# Altium PCB gecko3.PcbDoc (part 8 of 8)
Units mm, origin at the board's own origin, x right, y up, seen from the top; angles counter-clockwise.
Board outline 85.5 x 54.02 mm, 10 copper layers (Top Layer, MidLayer1, 1.2 & 2.5V Plane, GND Plane1, DDR layer 1, 3.3V Plane, DDR layer 2, GND Plane2, MidLayer2, Bottom Layer), stack 1.39 mm thick; 295 components, 567 nets, 2310 pads, 1568 vias.
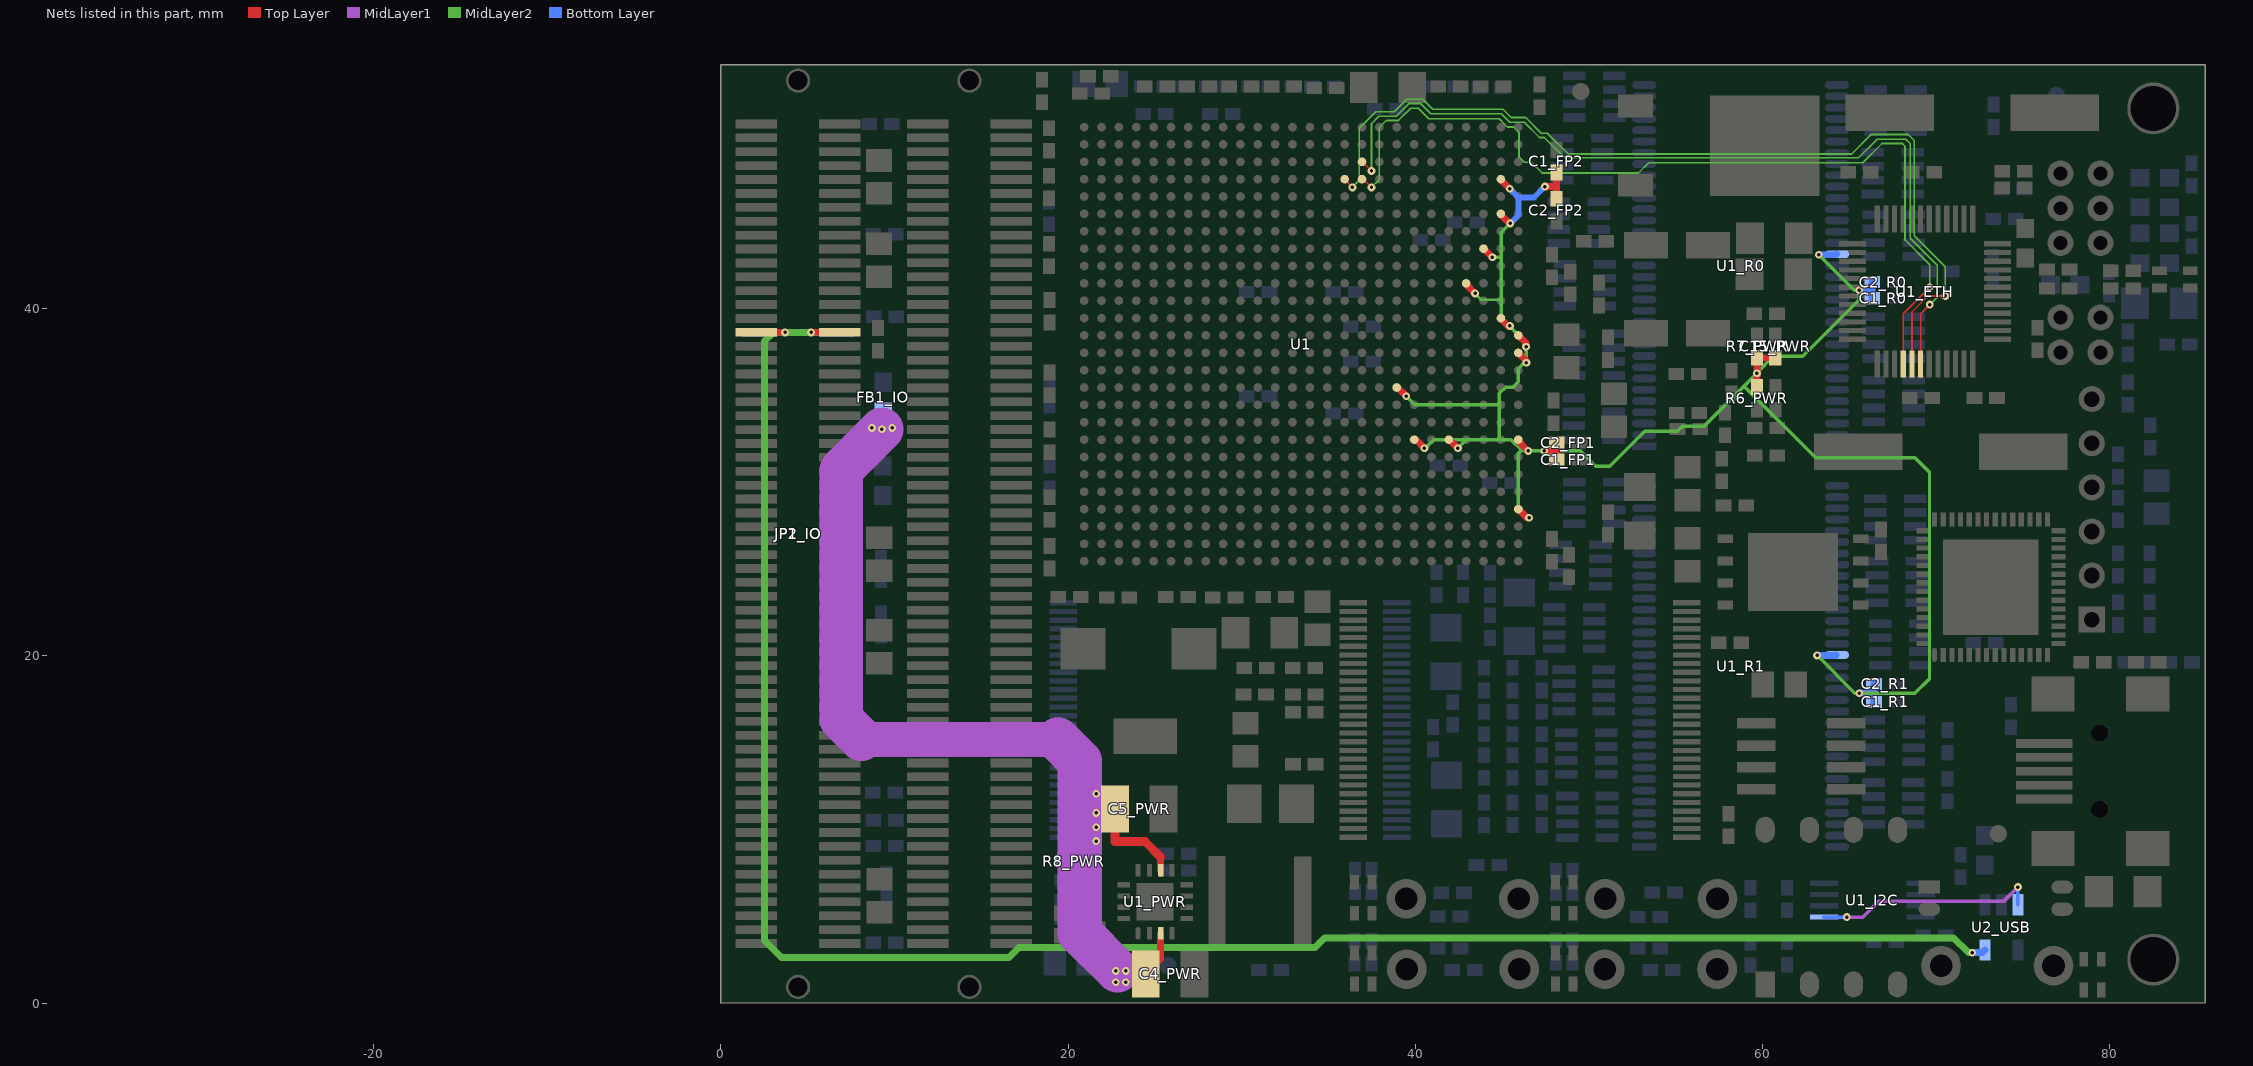
[diagram p16: the nets of this part, all layers, seen from the top]

## Via types
v1: diameter 0.45, hole 0.2, Top Layer to Bottom Layer, tented both sides, 1470 vias
v2: diameter 0.45, hole 0.2, Top Layer to Bottom Layer, tented bottom, 62 vias
v3: diameter 0.35, hole 0.15, Top Layer to MidLayer1, tented both sides, 26 vias
v4: diameter 0.45, hole 0.2, MidLayer2 to Bottom Layer, tented both sides, 10 vias

## Nets (pads, with @x,y where several pads share a name; then routed paths per layer and width w, separated by ;. In a path a pad name is that pad's centre, name@x,y a point inside that pad or via, vN(x,y) a via of type N, cw(c..) or ccw(c..) an arc to the next point about the centre after c; other vN are vias at no path point) (continued)
TXD_1: U1.AC10 U1_ETH.4 | length 52
  Top Layer w0.1: U1.AC10@36.927,47.449 37.001,47.449 v1(37.475,46.975) ; U1_ETH.4@68.1,36.8 68.1,39.7 v1(69.625,41.225)
  MidLayer2 w0.1: v1(37.475,46.975) 37.925,47.425 37.925,50.425 38.325,50.825 39.025,50.825 39.725,51.525 40.175,51.525 40.773,50.927 44.823,50.927 45.137,50.612 45.3,50.45 45.65,50.45 45.975,50.125 45.975,48.725 46.275,48.425 46.675,48.425 47.3,47.8 52.85,47.8 53.45,48.4 65.775,48.4 66.875,49.5 68.05,49.5 68.2,49.35 68.2,43.95 69.625,42.525 v1(69.625,41.225)
TXD_2: U1.AC11 U1_ETH.5 | length 53.8
  Top Layer w0.1: U1.AC11@35.927,47.449 35.927,47.423 v1(36.375,46.975) ; U1_ETH.5@68.6,36.8 68.6,39.8 69.525,40.725 v1(70.525,40.725)
  MidLayer2 w0.1: v1(36.375,46.975) 36.775,47.375 36.775,50.375 37.725,51.325 38.775,51.325 39.5,52.05 40.425,52.05 41,51.475 45.05,51.475 45.525,51 46.35,51 47.25,50.1 47.6,50.1 48.8,48.9 65.125,48.9 66.25,50.025 68.375,50.025 68.725,49.675 68.725,44.2 70.525,42.4 v1(70.525,40.725)
TXD_3: U1.AD10 U1_ETH.6 | length 50.5
  Top Layer w0.1: U1.AD10@36.976,48.424 v1(37.475,47.925) ; U1_ETH.6@69.1,36.8 69.1,39.7 v1(69.625,40.225)
  MidLayer2 w0.1: v1(37.475,47.925) 37.475,50.65 37.9,51.075 38.9,51.075 39.625,51.8 40.305,51.8 40.892,51.213 44.942,51.213 45.34,50.815 45.43,50.725 46.275,50.725 47.15,49.85 47.425,49.85 48.6,48.675 65.525,48.675 66.6,49.75 68.25,49.75 68.5,49.5 68.5,44.05 70.05,42.5 70.05,40.65 v1(69.625,40.225)
UBATT: C4_PWR.2 C5_PWR.2 FB1_IO.1 R8_PWR.1 U1_PWR.3 U1_PWR.10 | length 56.2
  Top Layer w0.4: C4_PWR.2@24.475,1.675 25.331,2.531 U1_PWR.3@25.331,4.019 ; U1_PWR.10@25.331,7.659 25.331,8.394
  Top Layer w0.5: C5_PWR.2@22.7,11.175 22.7,9.3 24.425,9.3 25.331,8.394
  MidLayer1 w2: 8.097,15.178 19.425,15.178
  MidLayer1 w2.5: 8.097,15.178 6.925,16.35 6.925,30.7 v1(9.275,33.05)
  MidLayer1 w2.54: 19.425,15.178 20.675,13.928 20.675,4.05 v1@22.85,1.875
  Bottom Layer w0.4: R8_PWR.1@19.675,8.175 19.675,8.225 20.475,9.025 21.325,9.025 v1(21.625,9.325)
  other v1: 22.75,1.2 23.325,1.2 22.75,1.85 23.325,1.85 21.625,10.125 21.625,10.95 21.625,12.05 8.7,33.125 9.875,33.125
VBUS: JP1_IO.31 JP1_IO.32 JP2_IO.31 JP2_IO.32 U2_USB.5 | length 115.2
  Top Layer w0.381: JP2_IO.31@2.05,38.625 v1(3.7,38.625) ; v1(5.2,38.625) JP2_IO.32@6.85,38.625
  MidLayer2 w0.4: v1(5.2,38.625) 3.025,38.625 2.525,38.125 2.525,3.6 3.5,2.625 16.595,2.625 17.17,3.2 34.225,3.2 34.775,3.75 71,3.75 71.85,2.9 v1(72.075,2.9)
  Bottom Layer w0.381: JP1_IO.31@2.25,38.625 v1(3.7,38.625) ; v1(5.2,38.625) JP1_IO.32@6.65,38.625
  Bottom Layer w0.4: v1(72.075,2.9) 72.65,2.9 U2_USB.5@72.8,3.05
VBUS_SW: U1_I2C.5 U2_USB.3 | length 12.9
  MidLayer1 w0.2: v1(64.85,4.95) 65.775,4.95 66.675,5.85 73.875,5.85 v1(74.7,6.675)
  Bottom Layer w0.2: U1_I2C.5@63.525,4.95 v1(64.85,4.95) ; v1(74.7,6.675) 74.7,5.663 U2_USB.3@74.704,5.659
VREF: C1_FP1.1 C1_FP2.1 C1_R0.2 C1_R1.2 C2_FP1.2 C2_FP2.2 C2_R0.2 C2_R1.2 C15_PWR.2 R6_PWR.1 R7_PWR.2 U1.AA2 U1.AC2 U1.D1 U1.H1 U1.H5 U1.H7 U1.L8 U1.N1 U1.P1 U1.R2 U1.U4 U1.W3 U1_R0.49 U1_R1.49 | length 118.4
  Top Layer w0.2: v1@45.392,38.941 v1(45.45,39)
  Top Layer w0.4: U1.L8@38.927,35.449 38.976,35.449 v1(39.475,34.95) ; U1.H7@39.927,32.449 40.026,32.449 v1(40.525,31.95) ; U1.H5@41.927,32.449 41.951,32.449 v1(42.45,31.95) ; U1.U4@42.927,41.423 U1.U4@42.927,41.449 ; U1.U4@42.938,41.369 v1(43.436,40.871) ; U1.W3@43.927,43.449 U1.W3@43.976,43.449 ; U1.W3@43.987,43.395 v1(44.436,42.946) ; U1.R2@44.938,39.395 45.342,38.991 v1(45.45,39) ; U1.AA2@44.938,45.395 45.437,44.896 v1(45.461,44.896) ; U1.AC2@44.938,47.395 v1(45.441,46.891) ; U1.D1@45.927,28.449 v1@46.425,27.95 ; U1.D1@45.927,28.449 U1.D1@45.976,28.449 ; U1.H1@45.927,32.449 45.927,32.373 v1(46.5,31.8) ; U1.N1@45.927,37.449 46.4,36.976 v1(46.4,36.875) ; U1.P1@45.927,38.449 46.375,38.001 v1(46.375,37.8) ; v1(47.425,31.8) 48.15,31.8 ; v1(47.461,47.021) 48.133,47.021 ; C2_FP2.2@48.133,46.263 C1_FP2.1@48.133,47.777 ; C1_FP1.1@48.15,31.3 C2_FP1.2@48.15,32.275 ; R6_PWR.1@59.664,35.482 R6_PWR.1@59.671,35.475 ; R7_PWR.2@59.664,37.147 R7_PWR.2@59.679,37.162 C15_PWR.2@60.729,37.162 ; R6_PWR.1@59.675,35.428 R7_PWR.2@59.675,37.093
  MidLayer2 w0.15: v1(43.436,40.871) 43.811,40.496 44.936,40.496
  MidLayer2 w0.2: v1(39.475,34.95) 39.976,34.45 44.837,34.45 ; v1@40.505,31.955 40.555,31.955 41.049,32.449 45.507,32.449 46.155,31.8 ; v1@42.467,31.983 42.933,32.449 ; v1(44.436,42.946) 44.44,42.95 44.936,42.95 ; 44.837,32.449 44.837,35.113 45.2,35.475 45.625,35.475 45.92,35.77 45.92,36.52 46.373,36.973 46.373,38.033 44.936,39.471 44.936,44.396 v1@45.431,44.891 ; v1(46.55,27.95) 45.925,28.575 45.925,31.65 46.075,31.8 49.5,31.8 50.385,30.915 51.19,30.915 53.203,32.928 55.093,32.928 55.386,33.221 56.625,33.221 v1(59.675,36.271) ; 58.927,35.523 63.05,31.4 68.775,31.4 69.611,30.564 69.611,18.686 68.771,17.846 65.311,17.846 v1(63.136,20.021) ; v1@59.675,36.31 60.611,37.246 62.306,37.246 65.561,40.501 v4(65.561,41.046) 65.286,41.046 v1(63.236,43.096)
  Bottom Layer w0.34: v1(45.441,46.891) 45.937,46.396 ; v1(45.461,44.896) 45.937,45.372 45.937,46.396 ; v1(47.461,47.021) 46.836,46.396 45.937,46.396
  Bottom Layer w0.4: v1(63.136,20.021) 64.211,20.021 U1_R1.49@64.236,20.046 ; v1(63.236,43.096) 64.211,43.096 U1_R0.49@64.261,43.146 ; v1(65.561,17.846) 66.411,17.846 ; v4(65.561,41.046) 66.309,41.046 ; C1_R0.2@66.309,40.591 C2_R0.2@66.309,41.516 ; C1_R1.2@66.411,17.271 C2_R1.2@66.411,18.371
pads on no net: Fiducial11.0 Fiducial12.0 Fiducial13.0 Fiducial14.0 JP1_IO2.0 JP1_IO.0 JP1_USB.ID JP2_IO2.0 JP2_IO.0 Q1_FP1.1 RA10_R0.1 RA10_R0.8 RA10_R1.1 RA10_R1.8 U1.A13 U1.AA1 U1.AA3 U1.AA4 U1.AA5 U1.AA6 U1.AA8 U1.AA15 U1.AA16 U1.AA17 U1.AA19 U1.AA23 U1.AB1 U1.AB2 U1.AB6 U1.AB7 U1.AB8 U1.AB15 U1.AB16 U1.AC8 U1.AC9 U1.AC16 U1.AC17 U1.AC18 U1.AD8 U1.AD9 U1.AD15 U1.AD17 U1.AD18 U1.AE5 U1.AE6 U1.AE9 U1.AE10 U1.AE11 U1.AE15 U1.AE16 U1.AE17 U1.AF4 U1.AF6 U1.AF10 U1.AF11 U1.AF15 U1.AF16 U1.AF17 U1.B13 U1.B14 U1.E1 U1.E2 U1.F1 U1.F2 U1.F3 U1.F4 U1.F22 U1.G4 U1.G5 U1.G6 U1.G7 U1.H6 U1.W15 U1.W16 U1.Y1 U1.Y2 U1.Y4 U1.Y5 U1.Y6 U1.Y7 U1.Y16 U1.Y19 U1.Y20 U1.Y21 U1_ETH.8 U1_ETH.9 U1_ETH.10 U1_ETH.11 U1_ETH.12 U1_ETH.25 U1_ETH.27 U1_FL.56 U1_PWR.12 U1_R0.14 U1_R0.19 U1_R0.25 U1_R0.43 U1_R0.50 U1_R0.53 U1_R1.14 U1_R1.19 U1_R1.25 U1_R1.43 U1_R1.50 U1_R1.53 U1_USB.54 U2_FL.56 U2_USB.4
copper on no net: | length 7
  Top Layer w0.254: -0.525,11.025 0.35,11.025
  MidLayer1 w0.254: -0.525,12.575 0.35,12.575
  1.2 & 2.5V Plane w0.254: -0.525,14.075 0.35,14.075
  3.3V Plane w0.254: -0.525,18.5 0.35,18.5
  DDR layer 1 w0.101: -0.525,17 0.35,17
  DDR layer 2 w0.101: -0.525,19.975 0.35,19.975
  MidLayer2 w0.15: -0.525,23 0.35,23
  Bottom Layer w0.34: -0.525,24.775 0.35,24.775

## Polygon pours and split planes (outlines as drawn)
GND on Top Layer "Top Layer-GND 1" (solid, remove dead copper, pour order 1001): 58.475,44.913 58.475,37.293 51.722,37.293 51.722,42.855 50.305,42.855 50.305,44.938 58.475,44.938
GND on Top Layer "Top Layer-GND 2" (solid, remove dead copper, pour order 1003): 55.587,53.65 55.587,45.218 63.639,45.218 63.639,53.676 55.587,53.676
GND on Top Layer "Top Layer-GND" (solid, remove dead copper, pour order 1000): 64.1,53.663 64.1,48.532 79.7,48.532 79.7,53.663
GND on Top Layer "Top Layer-No Net" (solid, remove dead copper, pour order 1004): 78.125,29.25 78.125,35.675 62.425,35.675 62.425,29.25
EARTH on Top Layer "Top Layer-EARTH" (solid, remove dead copper, pour order 1000): 75.45,18.825 75.45,7.875 81.375,7.875 81.375,5.4 85.1,5.4 85.1,18.8 75.45,18.8
GND on MidLayer1 "MidLayer1-GND" (solid, remove dead copper, pour order 1000): 20.7,14.125 35.425,14.125 35.425,0.275 22.95,0.275 22.95,2.95 20.7,2.95
1.2V on 1.2 & 2.5V Plane "1.2 & 2.5V Plane-1.2V" (solid, remove dead copper, pour order 1001): 17.311,53.429 17.311,7.504 50.918,7.504 50.918,53.429
2.5V on 1.2 & 2.5V Plane "1.2 & 2.5V Plane-2.5V" (solid, remove dead copper, pour order 1000): 1.3,52.725 1.3,1.325 84.175,1.325 84.175,52.725
3.3V on 3.3V Plane "3.3V Plane-3.3V" (solid, remove dead copper, pour order 1000): 1.3,52.75 1.3,52.85 46.875,52.85 46.875,53.675 49.925,53.675 49.925,53.125 53.175,53.125 53.175,52.75 84.175,52.75 84.175,1.325 1.3,1.325
GND on GND Plane1 (split plane): 85.194,0.331 0.306,0.306 0.306,15.513 0.35,15.513 0.447,15.553 0.487,15.65 0.447,15.747 0.35,15.787 0.306,15.787 0.306,53.719 85.194,53.719
GND on GND Plane2 (split plane): 85.194,0.331 0.306,0.306 0.306,21.388 0.35,21.388 0.447,21.428 0.487,21.525 0.447,21.622 0.35,21.662 0.306,21.662 0.306,53.719 85.194,53.719

## Keep-outs
Keep-Out Layer:
  region: 76.188,1.575 70.938,1.575 70.938,0.047 76.188,0.047
  region: 83.653,36.725 83.653,31.475 85.453,31.475 85.453,36.725
  rectangle: 6.625,52.178 11.875,53.978
  region: 12.05,1.85 6.8,1.85 6.8,0.05 12.05,0.05
  lines w0.6: 0,0 85.5,0 85.5,54.025 0,54.025 0,0

## Other copper
Top Layer:
  rectangle net GND: 66.425,44.375 67.1,45.925
  rectangle net GND: 27.65,0.875 29.325,2.225
  rectangle net GND: 26,9.825 27,12.525
  rectangle net UBATT: 22.475,0.875 23.9,2.225
  rectangle net 1.2V: 33.025,3.25 34.8,10.575
  rectangle net NetL1_PWR_1: 25.825,3.325 28.275,4.4
  rectangle net NetL1_PWR_1: 26.475,4.375 28.275,5.025
  rectangle net NetL1_PWR_1: 26.475,6.675 28.275,7.325
  rectangle net NetL1_PWR_1: 25.825,7.3 28.275,8.375
  rectangle net GND: 26.475,5.375 27.75,6.3
  rectangle net NetFB2_IO_2: 0.85,30.375 8.05,32.475
  rectangle net NetFB1_IO_2: 0.85,35.175 8.05,37.275
  rectangle net GND: 28.45,10.368 31.15,12.568
  rectangle net 1.2V: 31.5,10.4 34.8,12.6
  rectangle net GND: 25,19.2 28.05,21.6
  rectangle net 3.3V: 19.9,19.2 22.95,21.6
  rectangle net GND: 80.1,0.325 85.175,5
  rectangle net GND: 80.1,49 85.175,53.675
  rectangle net UBATT: 21.125,9.05 23.5,12.65
1.2 & 2.5V Plane:
  region net 2.5V: 44.725,52.35 44.725,53.7 42.15,53.7 42.15,52.35
  region net 2.5V: 37.05,52.475 37.05,53.1 21.225,53.1 21.225,52.475
  pour cut-out: -14.25,8.45 -13.325,9.375 -11.975,14.65 -10.575,14.65 -9.95,15.025 -9.95,21.675 -10.225,21.95 -11.55,21.95 -11.575,24.85 -12.275,25.6 -14.6,25.575 -15.55,24.575 -16.775,24.55 -16.775,26.55 -14.52,28.77 -10.95,28.775 -10.95,32.4 -15.25,32.375 -15.75,32.825 -15.75,34.4 -17.8,34.4 -17.725,40.55 -16.05,40.55 -16.05,42.275 -15.25,42.275 -13.1,41.325 -10.45,40.5 -8.55,36.65 -6.575,36.65 -4.825,40.025 -4.8,40.7 -6.075,40.975 -8.5,41.575 -11.025,44.075 -11.025,49.4 -10.8,52.071 -11.675,52.075 -14.35,49.775 -18.125,49.775 -18.125,51.025 -18.925,52.225 -21.225,52.225 -21.525,50.725 -23.575,50.725 -23.775,52.25 -25.95,52.254 -25.95,50.95 -25.05,50.175 -25.05,49.375 -28.05,49.375 -30.125,52.075 -32.35,52.075 -32.35,51.275 -32.1,49.875 -34.6,47.25 -34.6,45.075 -35.6,44.425 -35.575,43.175 -32.9,43.175 -32.9,40.3 -36.5,40.3 -36.525,34.525 -32.475,34.525 -32.5,27.475 -25.05,27.525 -25.05,26.65 -25.025,25.625 -25.025,24.4 -26.699,24.403 -26.675,8.425
  pour cut-out: 77.55,12.063 73.875,12.063 72.6,13.25 72.6,18.95 73.1,20.738 74.125,20.738 74.875,18.925 74.881,16.884 74.9,14.163 75.15,13.863 77.55,13.863 77.55,13.813
Bottom Layer:
  rectangle net 3.3V: 8.425,28 10.125,29.8
  rectangle net NetFB2_IO_2: 1.225,30.375 9.975,32.475
  rectangle net UBATT: 8.425,32.8 10.125,34.6
  rectangle net NetFB1_IO_2: 1.225,35.175 9.975,37.275
  region net GND: 85.175,5 80.1,5 80.1,0.325 85.175,0.325
  region net GND: 85.175,53.675 80.1,53.675 80.1,49 85.175,49
  rectangle net GND: 83.45,38.6 85.05,39.55
  rectangle net 3.3V: 82.85,42.925 83.95,44.025
  rectangle net 3.3V: 82.85,46.3 83.975,47.15
  text "GECKO3main" at 71.2,35.525 h1.2
  text "BFH MicroLab" at 71.75,33.725 h1
  text "zem1 & zac1" at 72.05,32.825 h1
  text "V1 2007" at 72.975,31.8 h1
GND Plane1 (plane layer: these items are gaps in the copper):
  lines w0.254: -0.525,15.65 0.35,15.65
GND Plane2 (plane layer: these items are gaps in the copper):
  lines w0.254: -0.525,21.525 0.35,21.525

## Silkscreen, mask and mechanical layers (free items; w line width, h text height)
Mechanical 1:
  lines w0.1: 0,54.025 0,0 7.34,0 7.35,0.009 7.35,0.575 cw(c8.1,0.575) 8.85,0.575 8.85,0.003 ; 0.003,54.028 7.176,54.028 7.176,53.453 ; 7.177,53.453 ccw(c7.927,53.453) 8.677,53.453 8.677,54.028 ; 8.68,54.025 9.825,54.025 ; 8.853,0 8.85,0.003 ; 9.822,54.028 9.825,54.025 ; 9.995,0.003 8.85,0.003 ; 9.998,0 9.998,0.575 cw(c10.748,0.575) 11.498,0.575 ; 11.325,54.025 85.5,54.025 85.5,36.173 84.928,36.173 ccw(c84.928,35.423) 84.928,34.673 85.497,34.673 85.5,34.67 85.5,33.525 84.928,33.525 ccw(c84.928,32.775) 84.928,32.025 85.494,32.025 85.5,32.018 85.5,0 75.607,0 75.6,0.007 ; 11.335,54.028 11.325,54.019 11.325,53.453 cw(c10.575,53.453) 9.825,53.453 9.825,54.025 ; 11.499,0.575 11.499,0 71.475,0 71.475,0.3 cw(c72.225,0.3) 72.975,0.3 72.975,0 74.101,0 74.101,0.299 74.1,0.3 cw(c74.85,0.3) 75.6,0.3 75.6,0
Mechanical 2:
  lines w0.254: 0.05,11.775 8.85,11.775 8.85,42.275 0.05,42.275
  text "2.60 Diameter" at 76.375,60.35 h1.5
  text "all in mm" at -0.05,-17.075 h1.5
Mechanical 4:
  drawing of 296 lines, arcs and shapes, not listed
  text "Ethernet" at 83.65,44.15 h1 r90
  text "Serial Port" at 83,36.45 h1 r90
  text "Vcc" at 81.2,34.625 h1
  text "GND" at 81.2,31.975 h1
  text "TCK" at 81.175,29.5 h1
  text "TDO" at 81.175,26.775 h1
  text "TDI" at 81.175,24.35 h1
  text "TMS" at 81.175,22 h1
  text "GECKO3main" at 67.2,17.175 h1.2
  text "GND" at 23.475,16.6 h1
  text "I/O-Bus 2" at 19.45,12.225 h1 r90
  text "I/O-Bus 1" at 8.95,12.2 h1 r90
  text "Switch0..3" at 61.025,10.85 h1
  text "RESET, Button2" at 39.85,8.25 h1
  text "Button1, Button0" at 50.875,8.225 h1
  text "Optionswitch" at 70.1,7.675 h1
  text "LED 6/7" at 35.45,7.525 h1
  text "LED 2/3" at 46.975,7.5 h1
  text "Reprogram" at 75.55,4.175 h1
  text "LED 0/1" at 46.975,3.55 h1
  text "LED 4/5" at 35.45,3.5 h1
Mechanical 5:
  region: -7.775,12.4 -9.5,12.4 -9.5,10.95 -7.775,10.95
  region: 46.225,0.025 46.225,8.275 39.2,8.275 39.2,0.025
  region: 57.75,0.025 57.75,8.275 50.6,8.275 50.6,0.025
  region: 76.7,-0.175 76.7,4.2 70.475,4.2 70.475,-0.175
  region: 85.975,21.425 85.975,35.5 77.525,35.5 77.525,21.425
  region: 85.375,43.35 85.375,48.35 76.6,48.35 76.6,43.35
  region: 85.275,36.625 85.275,39.875 76.5,39.875 76.5,36.625
  region: 33.9,3.175 33.9,8.475 28.175,8.475 28.175,3.175
  text "X" at 21.25,14.7 h1.5
  text "= THT, placed by BFH" at -7.775,14.125 h1.5 r90
  text "X" at 81.4,12.575 h1.5
  text "X = place by hand" at -11.275,11.125 h1.5 r90
  text "Manufacturing Information Top" at -15.525,8.725 h1.5 r90
  text "X" at 63.05,5.55 h1.5
  text "X" at 70.475,5.325 h1.5
Mechanical 6:
  text "Manufacturing Information Bottom" at -15.525,54.075 h1.5 r90
  text "O" at 12.525,52.2 h1.5
  text "O" at 2.525,52.075 h1.5
  text "O = glue" at -11.7,51.05 h1.5 r90
  text "O" at 58.4,41.6 h1.5
  text "O" at 82.475,39.75 h1.5
  text "O" at 44.925,21.375 h1.5
  text "O" at 40.4,19.35 h1.5
  text "O" at 58.525,18.9 h1.5
  text "O" at 28.925,16.05 h1.5
  text "O" at 65.925,5.325 h1.5
  text "O" at 73.2,3.35 h1.5
  text "O" at 1.925,1 h1.5
  text "O" at 12.525,0.775 h1.5

## Dimensions
0,0 to 0,54.025 on Mechanical 2
0,0 to 85.5,0.025 on Mechanical 2
0,0 to 17.906,-0.127 on Mechanical 2
0,0 to 14.318,0.926 on Mechanical 2
0,0 to 4.45,0.925 on Mechanical 2
85.45,0.025 to 85.45,5.025 on Mechanical 2
85.5,0.025 to 80.1,5 on Mechanical 2
85.5,54.025 to 82.5,51.525 on Mechanical 2
82.5,51.525 to 85.5,54.025 on Mechanical 2

## Text inside footprints (layer, text, board x,y; h text height)
1: Mechanical 4 "Licensed" at 31.85,1.75 h1; Mechanical 4 "BY-NC-SA" at 31.85,0.8 h1; Mechanical 4 "CC" at 29.775,1.175 h1.3
U2_PWR: Top Overlay "1" at 52,50.825 h0.38 r270